# EAGLE board TopPanelV5 (EAGLE 8.2.2)
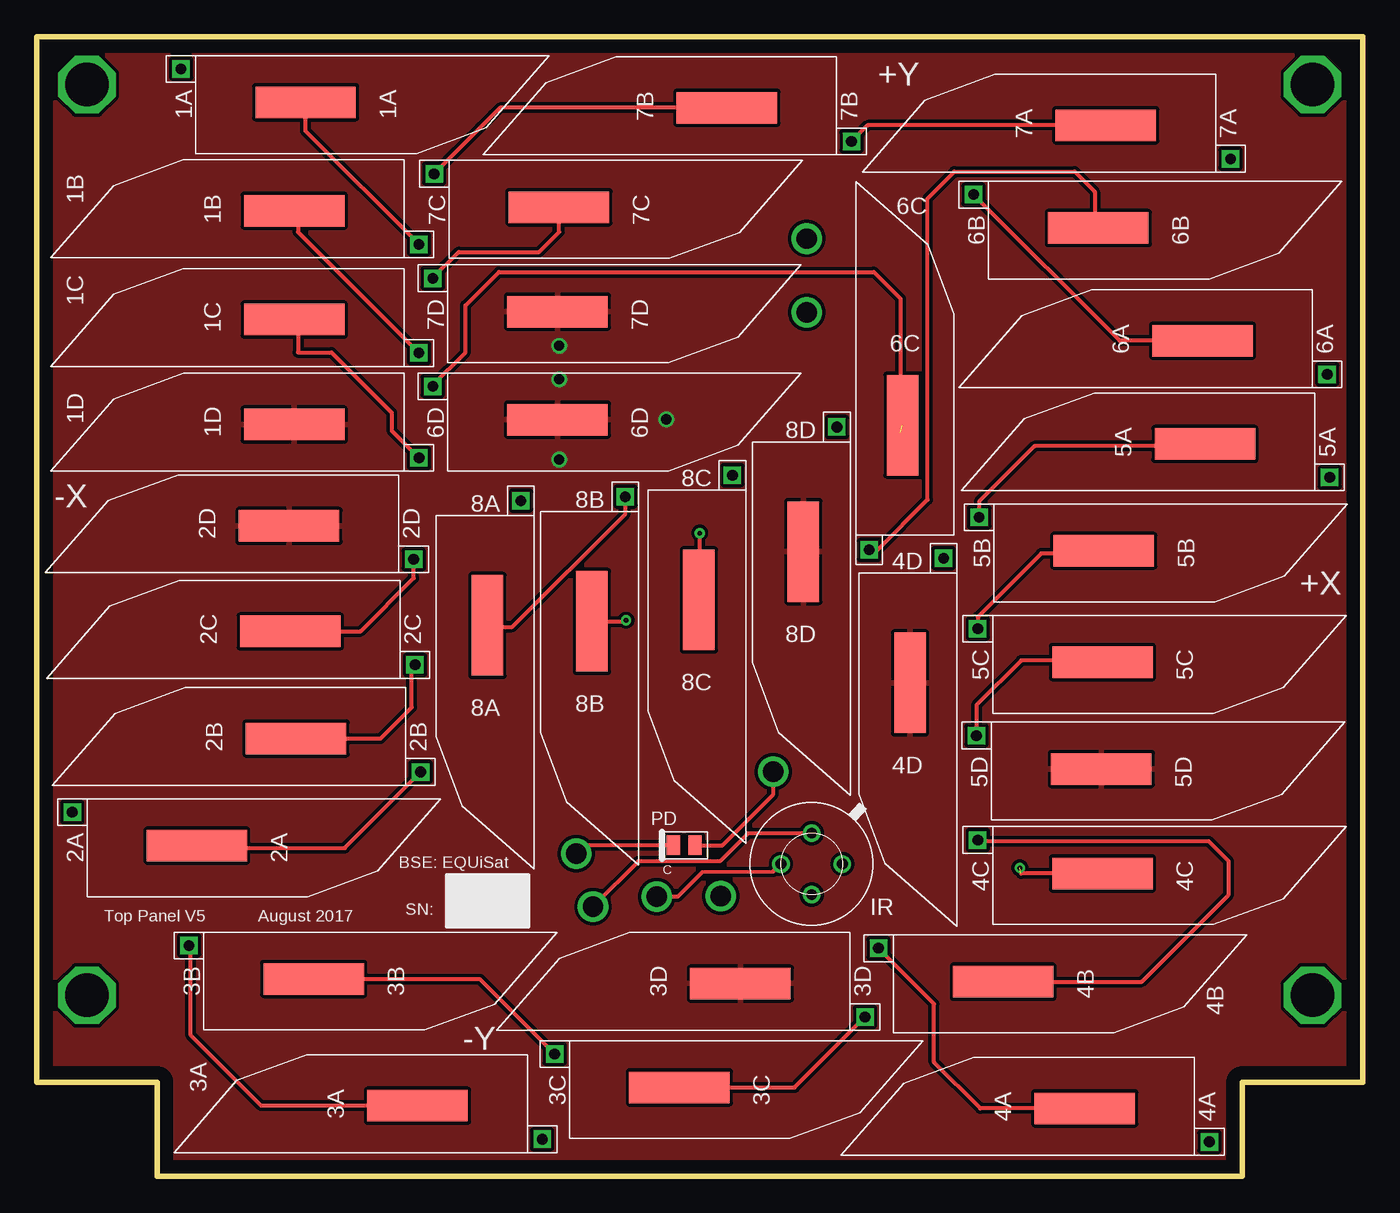
[diagram p0: board, top side]
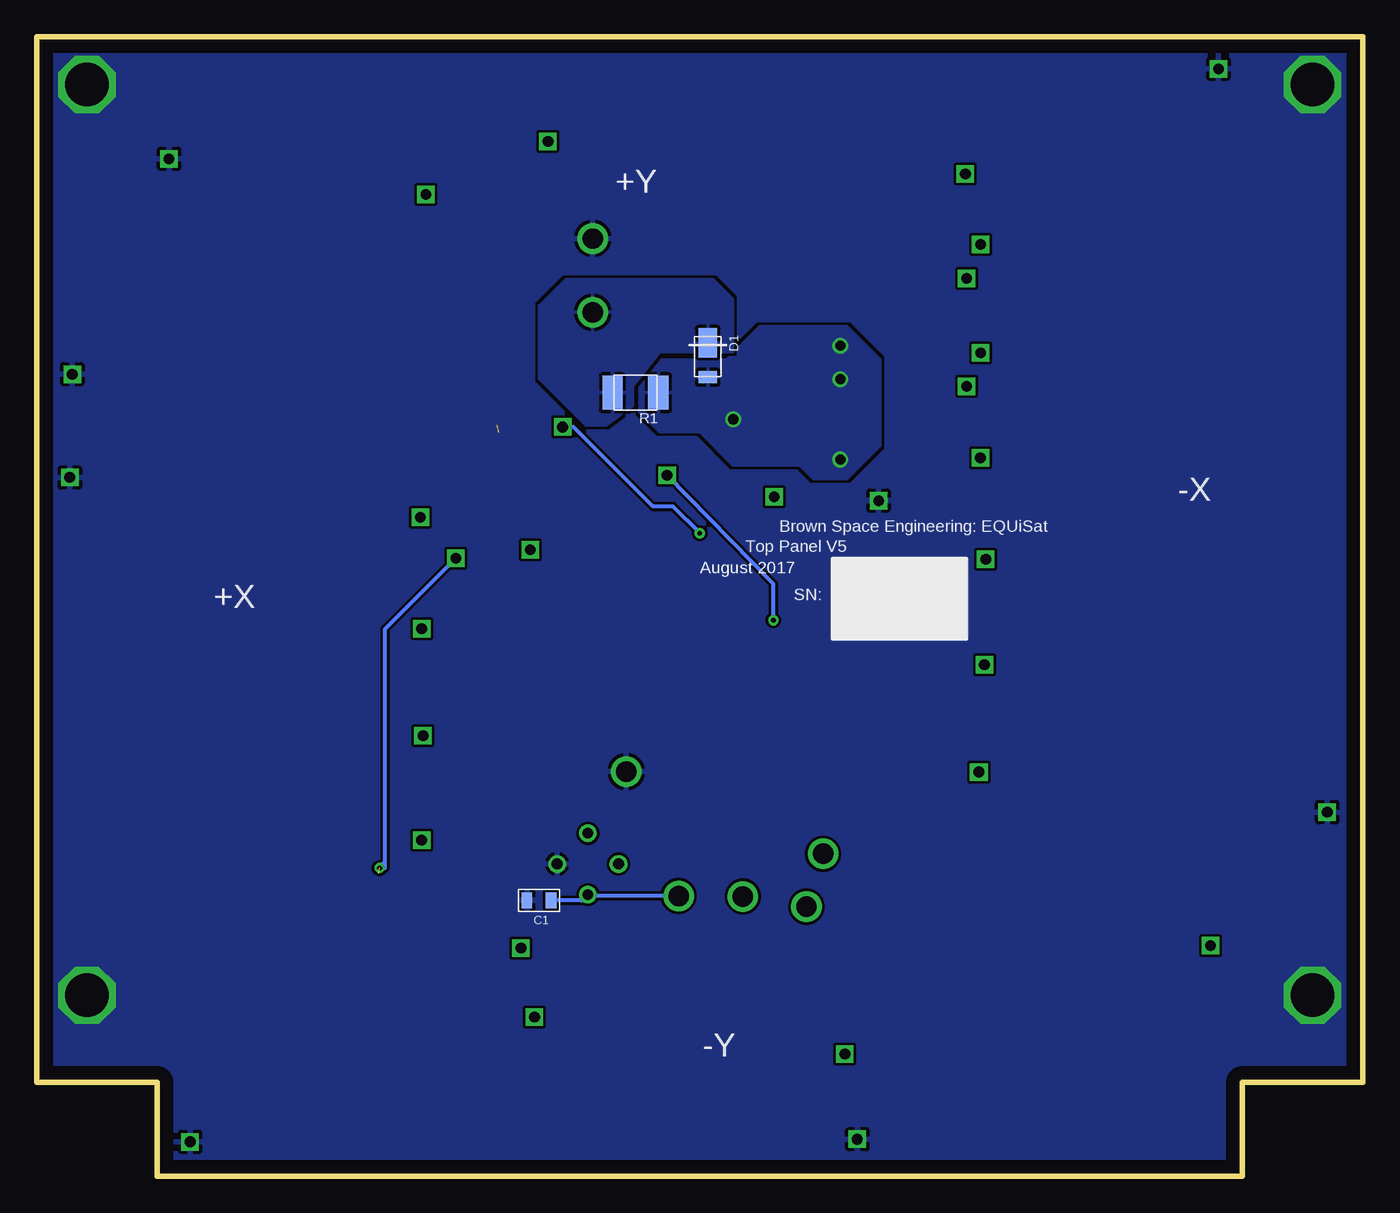
[diagram p1: board, bottom side, seen from below]

Size 99 x 85.07 mm. Coordinates in mm from the lower left corner, seen from the top.
Outline: 9,0 9,7 0,7 0,85.07 99,85.07 99,7 90,7 90,0 9,0
Copper layers (1*16): Top 0.035mm / dielectric 1.5mm / Bottom 0.035mm
Design rules "default": minimum track width 10mil, minimum drill 24mil, track to track 8mil, track to pad 8mil, pad to pad 8mil, via to via 8mil, smd to smd 8mil, copper to edge 40mil, drill to drill 8mil, minimum pad ring 10mil, minimum via ring 8mil, stop-mask expansion 4mil, vias tented up to drill 0mil, thermal gap 10mil

## Footprints (pad centres in the part's own frame; a part is rotated, then mirrored left to right if it is on the bottom)
TRISOLX-V3 = drill 0.8 square: ANODE 13.53,-1.54 | smd 7.5 x 2.35: CATHODE 4.22,0.96
0805 = smd 0.8 x 1.2: 1 -0.9,0; 2 0.9,0
PWRDI-123 = smd 0.9 x 1.4: A 1.45,0 | smd 2.2 x 1.4: C -1.1,0
MXL90620 = drill 0.8: SCL 2.293,0; VDD -2.293,0; VSS 0,-2.294 | drill 0.8 pad 1.2: SDA 0,2.294
TEMD6200 = smd 1 x 1.45: A 0.76,0.4; C -0.88,0.4
1210 = smd 1.52 x 2.54: P$1 -1.71,0 | smd 1.51 x 2.54: P$2 1.71,0
VIA-60MIL = drill 1.524: P$1 0,0

## Placement (x,y rotation side)
1A  SOLARCELLV3  [TRISOLX-V3]  24.29,81.13 180 top
1B  SOLARCELLV3  [TRISOLX-V3]  15,71.11 0 top
1C  SOLARCELLV3  [TRISOLX-V3]  15,63 0 top
1D  SOLARCELLV3  [TRISOLX-V3]  15.01,55.17 0 top
2A  SOLARCELLV3  [TRISOLX-V3]  16.17,25.63 180 top
2B  SOLARCELLV3  [TRISOLX-V3]  15.13,31.71 0 top
2C  SOLARCELLV3  [TRISOLX-V3]  14.71,39.71 0 top
2D  SOLARCELLV3  [TRISOLX-V3]  14.61,47.59 0 top
3A  SOLARCELLV3  [TRISOLX-V3]  24.21,4.29 0 top
3B  SOLARCELLV3  [TRISOLX-V3]  24.89,15.67 180 top
3C  SOLARCELLV3  [TRISOLX-V3]  52.19,7.57 180 top
3D  SOLARCELLV3  [TRISOLX-V3]  48.31,13.41 0 top
4A  SOLARCELLV3  [TRISOLX-V3]  74.03,4.09 0 top
4B  SOLARCELLV3  [TRISOLX-V3]  76.37,15.47 180 top
4C  SOLARCELLV3  [TRISOLX-V3]  83.79,23.55 180 top
4D  SOLARCELLV3  [TRISOLX-V3]  66.17,32.61 90 top
5A  SOLARCELLV3  [TRISOLX-V3]  83.01,53.71 0 top
5B  SOLARCELLV3  [TRISOLX-V3]  83.89,47.65 180 top
5C  SOLARCELLV3  [TRISOLX-V3]  83.79,39.33 180 top
5D  SOLARCELLV3  [TRISOLX-V3]  83.69,31.35 180 top
6A  SOLARCELLV3  [TRISOLX-V3]  82.83,61.41 0 top
6B  SOLARCELLV3  [TRISOLX-V3]  83.47,71.75 180 top
6C  SOLARCELLV3  [TRISOLX-V3]  63.69,60.29 270 top
6D  SOLARCELLV3  [TRISOLX-V3]  43.09,57.43 180 top
7A  SOLARCELLV3  [TRISOLX-V3]  75.6,77.5 0 top
7B  SOLARCELLV3  [TRISOLX-V3]  47.3,78.8 0 top
7C  SOLARCELLV3  [TRISOLX-V3]  43.2,73.3 180 top
7D  SOLARCELLV3  [TRISOLX-V3]  43.1,65.5 180 top
8A  SOLARCELLV3  [TRISOLX-V3]  34.6,36.9 90 top
8B  SOLARCELLV3  [TRISOLX-V3]  42.4,37.2 90 top
8C  SOLARCELLV3  [TRISOLX-V3]  50.4,38.8 90 top
8D  SOLARCELLV3  [TRISOLX-V3]  58.2,42.4 90 top
C1  0.1uF  [0805]  61.5,20.58 0 bottom
D1  DFLS130L  [PWRDI-123]  48.9,61.1 270 bottom
IR  MXL90614  [MXL90620]  57.86,23.31 90 top
PD  TEMD6200  [TEMD6200]  48.39,24.29 0 top
R1  0R  [1210]  54.3,58.5 180 bottom
SCL  SCL  [VIA-60MIL]  41.53,20.12 180 top
SDA  SDA  [VIA-60MIL]  46.29,20.87 180 top
V1  SP-PWR-OUT  [VIA-60MIL]  57.5,64.5 270 top
V2  GND  [VIA-60MIL]  57.5,70 0 top
V3  3V3-IR  [VIA-60MIL]  51.07,20.9 180 top
V4  GND  [VIA-60MIL]  55,30.2 180 top
V6  PD-OUT  [VIA-60MIL]  40.29,24.06 180 top

## Library data of the parts
1A 1B 1C 1D 2A 2B 2C 2D 3A 3B 3C 3D 4A 4B 4C 4D 5A 5B 5C 5D 6A 6B 6C 6D 7A 7B 7C 7D 8A 8B 8C 8D D1 PD R1 SCL SDA V1-V4 V6 = BrownSpaceEngineering
C1 IR = CNTRL_BOARD

## Nets
3V3-IR: C1.2 IR.VDD V3.P$1
GND: 1A.ANODE 2A.ANODE 3A.ANODE 4A.ANODE 5A.ANODE 6A.ANODE 7A.ANODE 8A.ANODE C1.1 IR.VSS PD.A V2.P$1 V4.P$1
N$1: 1C.CATHODE 1D.ANODE
N$2: 2C.CATHODE 2D.ANODE
N$3: 3C.CATHODE 3D.ANODE
N$4: 4C.CATHODE 4D.ANODE
N$5: 5C.CATHODE 5D.ANODE
N$6: 6C.CATHODE 6D.ANODE
N$7: 1A.CATHODE 1B.ANODE
N$8: 2A.CATHODE 2B.ANODE
N$9: 3A.CATHODE 3B.ANODE
N$10: 4A.CATHODE 4B.ANODE
N$11: 5A.CATHODE 5B.ANODE
N$12: 6A.CATHODE 6B.ANODE
N$13: 1B.CATHODE 1C.ANODE
N$14: 2B.CATHODE 2C.ANODE
N$15: 3B.CATHODE 3C.ANODE
N$16: 4B.CATHODE 4C.ANODE
N$17: 5B.CATHODE 5C.ANODE
N$18: 6B.CATHODE 6C.ANODE
N$19: 7C.CATHODE 7D.ANODE
N$20: 7A.CATHODE 7B.ANODE
N$21: 7B.CATHODE 7C.ANODE
N$22: 8C.CATHODE 8D.ANODE
N$23: 8A.CATHODE 8B.ANODE
N$24: 8B.CATHODE 8C.ANODE
PD-OUT: PD.C V6.P$1
SCL: IR.SCL SCL.P$1
SDA: IR.SDA SDA.P$1
SP-PWR: 1D.CATHODE 2D.CATHODE 3D.CATHODE 4D.CATHODE 5D.CATHODE 6D.CATHODE 7D.CATHODE 8D.CATHODE D1.A R1.P$1
SP-PWR-OUT: D1.C R1.P$2 V1.P$1

## Tracks (layer width: path | path; a pad name or v marks a point on that pad's centre or on a via)
3V3-IR
  Bottom 0.3: V3.P$1 57.75,20.9 IR.VDD 58.3,20.57 C1.2
GND  (via drill 3.26)
  Top 0.3: PD.A 51.19,24.69 55,28.5 V4.P$1
  other vias: 3.75,13.5 95.25,13.5 95.25,81.5 3.75,81.5
  pour Bottom (rank 3): -4.21,107.98 115.7,107.98 116.1,97.91 124.31,97.91 125.31,-15.1 -9.71,-15.1 -9.81,-14.24 -12.11,-14.24 -13.01,98.57 -3.81,98.57
N$1
  Top 0.3: 1D.ANODE 26.5,55.67 26.5,57 22,61.5 19.5,61.5 19.5,63.68 1C.CATHODE 21.04,63.96 22,63
N$2
  Top 0.3: 2C.CATHODE 24.17,40.67 28.14,44.64 2D.ANODE
N$3
  Top 0.3: 3C.CATHODE 56.58,6.61 3D.ANODE
N$4  (via drill 0.35)  (1 unrouted)
  Top 0.3: 4C.CATHODE 73.49,22.59
  Bottom 0.3: 73,23 73,23.5 | 73,23.5 73,40.85 4D.ANODE | 73,23.5 73.4,23.1 v73.4,23
N$5
  Top 0.3: 5C.CATHODE 79.44,38.5 73.5,38.5 70.16,35.16 5D.ANODE
N$6  (1 unrouted)
  Top 0.3: 6D.ANODE 29.56,59.06 32,61.5 32,65 34.5,67.5 62.5,67.5 64.5,65.5 64.5,55.5 65,55
N$7
  Top 0.3: 1B.ANODE 20.07,78.03 1A.CATHODE
N$8
  Top 0.3: 2A.CATHODE 12.12,24.5 22.99,24.5 2B.ANODE
N$9
  Top 0.3: 3A.CATHODE 16.75,5.25 11.5,10.5 11.5,17.07 3B.ANODE
N$10
  Top 0.3: 4A.CATHODE 70.45,5.05 67,8.5 67,12.85 4B.ANODE
N$11
  Top 0.3: 5A.CATHODE 87.06,54.5 74.5,54.5 70.36,50.36 5B.ANODE
N$12
  Top 0.3: 6A.CATHODE 80.86,62.37 6B.ANODE
N$13
  Top 0.3: 28.04,61.46 1C.ANODE 19.5,70.49 19.5,71.79 1B.CATHODE
N$14
  Top 0.3: 2B.CATHODE 25.67,32.67 28,35 28,37.93 2C.ANODE
N$15
  Top 0.3: 3B.CATHODE 33.06,14.71 3C.ANODE
N$16
  Top 0.3: 4B.CATHODE 82.51,14.51 89,21 89,23.5 87.5,25 70.35,25 4C.ANODE
N$17
  Top 0.3: 5B.CATHODE 79.48,46.5 75,46.5 70.26,41.76 5C.ANODE
N$18
  Top 0.3: 79.25,70.98 6B.CATHODE | 79.25,70.98 79.25,71.25 | 6C.ANODE 62.76,46.76 66.5,50.5 66.5,73 68.5,75 77.5,75 79,73.5 79,71.23 79.25,70.98
N$19
  Top 0.3: 7D.ANODE 29.57,67.07 31.5,69 37.5,69 39,70.5 39,72.32 7C.CATHODE
N$20
  Top 0.3: 7A.CATHODE 62.03,78.46 7B.ANODE
N$21
  Top 0.3: 7B.CATHODE 34.59,79.76 7C.ANODE
N$22  (via drill 0.35)
  Top 0.3: 8C.CATHODE 49.5,42.88 v49.5,48
  Bottom 0.3: v49.5,48 51.5,50 53,50 58.93,55.93 8D.ANODE
N$23
  Top 0.3: 8A.CATHODE 33.76,41 35.5,41 43.94,49.44 8B.ANODE
N$24  (via drill 0.35)
  Top 0.3: 8B.CATHODE 43.92,41.42 v44,41.5
  Bottom 0.3: v44,41.5 44,44.19 8C.ANODE
N$25
  Top 0.25: 99,85.07 99,7 90,7 90,0 9,0 9,7 0,7 0,85.07 99,85.07
PD-OUT
  Top 0.3: PD.C 40.92,24.69 V6.P$1
SCL
  Top 0.3: IR.SCL 53.1,25.6 51,23.5 44.91,23.5 SCL.P$1
SDA
  Top 0.3: SDA.P$1 47.87,20.87 49.69,22.71 54.97,22.73 IR.SDA
SP-PWR  (via drill 0.76)
  other vias: 39,59.5 39,62 39,53.5 47,56.5
  pour Top (isolate 0.254, rank 2): 107.53,106.8 107.53,-30.08 -18.98,-26.28 -13,105.8
  pour Bottom (rank 2): 46,62.5 45,63.5 38.5,63.5 36,61 36,54.5 38.5,52 41,52 42,53 47,53 49.5,55.5 52.5,55.5 54,57 54,59.5 52.5,61 47.5,61
SP-PWR-OUT
  pour Bottom: 47,61.5 52.5,61.5 54.5,59 54.5,57.5 56.5,56 58,56 61.5,59.5 61.5,65 59.5,67 48.5,67 47,65.5

## Text on the board
tNames: +Y | -X | +X | BSE: EQUiSat | SN: | Top Panel V5 | August 2017 | -Y
bNames: +Y | -X | Brown Space Engineering: EQUiSat | Top Panel V5 | August 2017 | SN: | +X | -Y